# Altium PCB LSEL_PCB.PcbDoc
Units mm, origin at the board's own origin, x right, y up, seen from the top; angles counter-clockwise.
Board outline 60 x 40 mm, 4 copper layers (Top Layer, GND, VDD, Bottom Layer), stack 0.603 mm thick; 31 components, 23 nets, 143 pads, 107 vias.
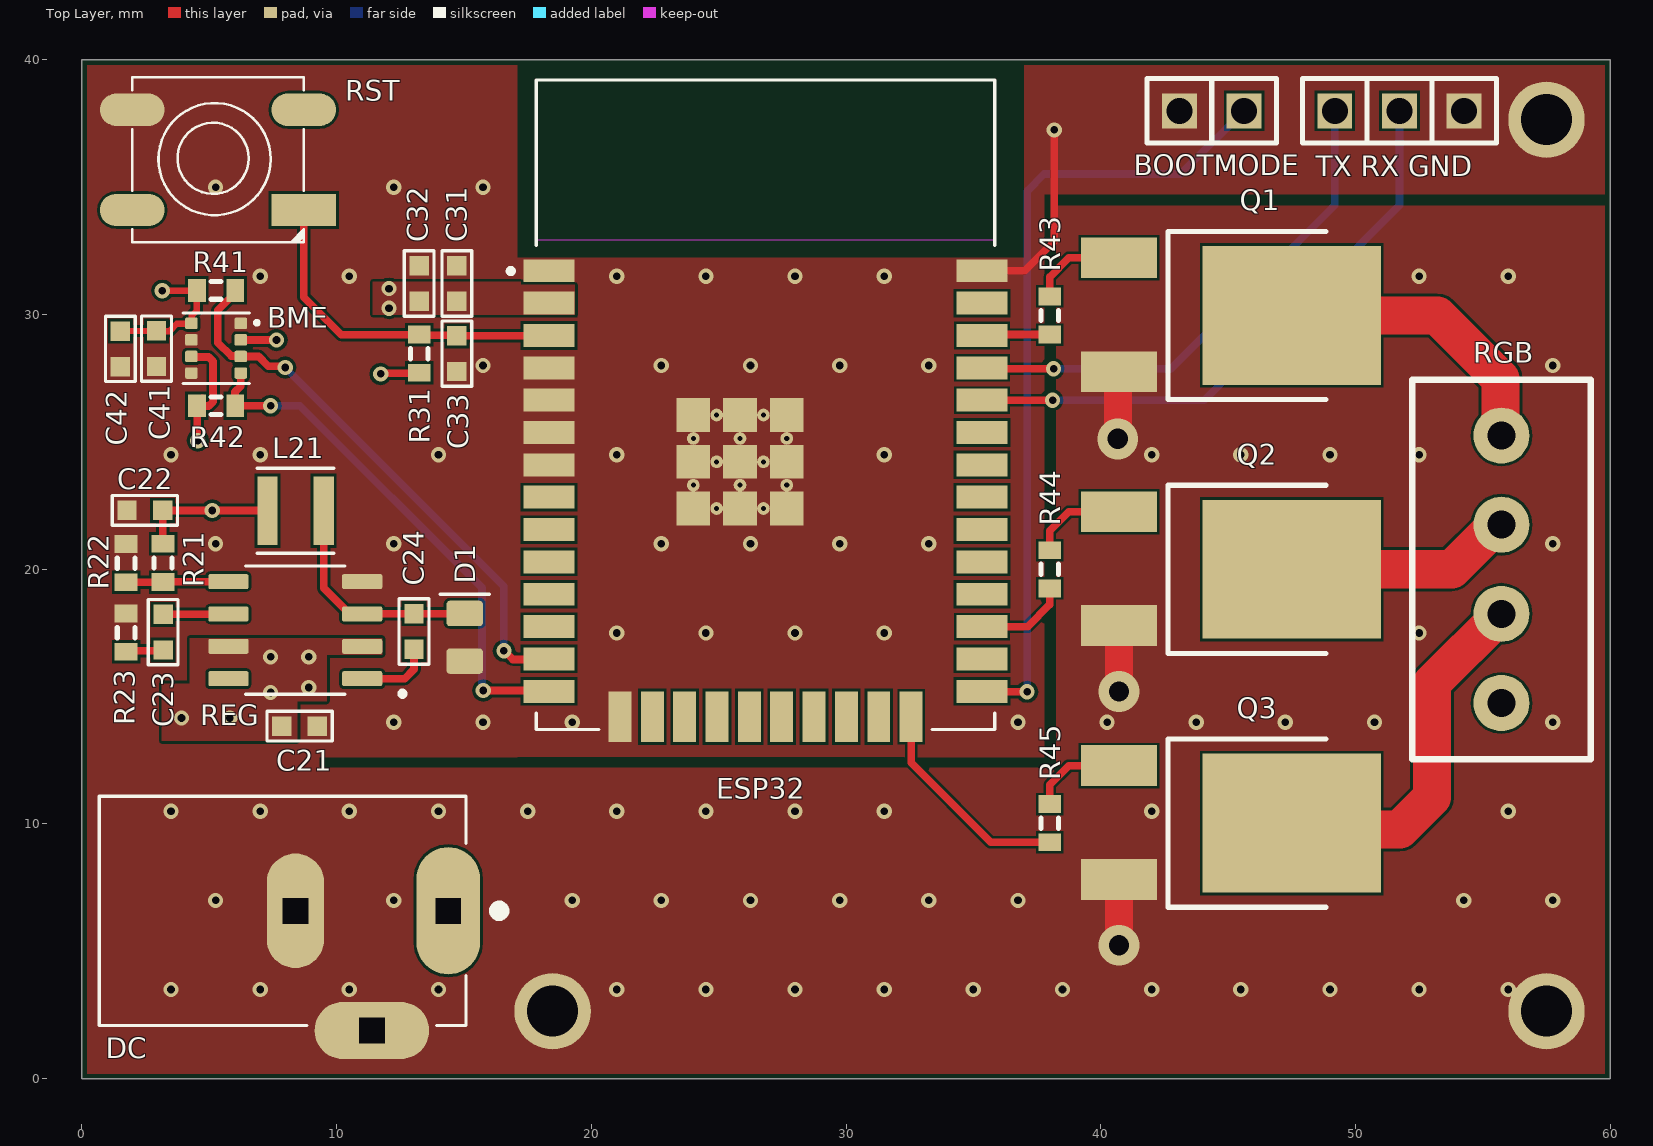
[diagram p0: Top Layer view]
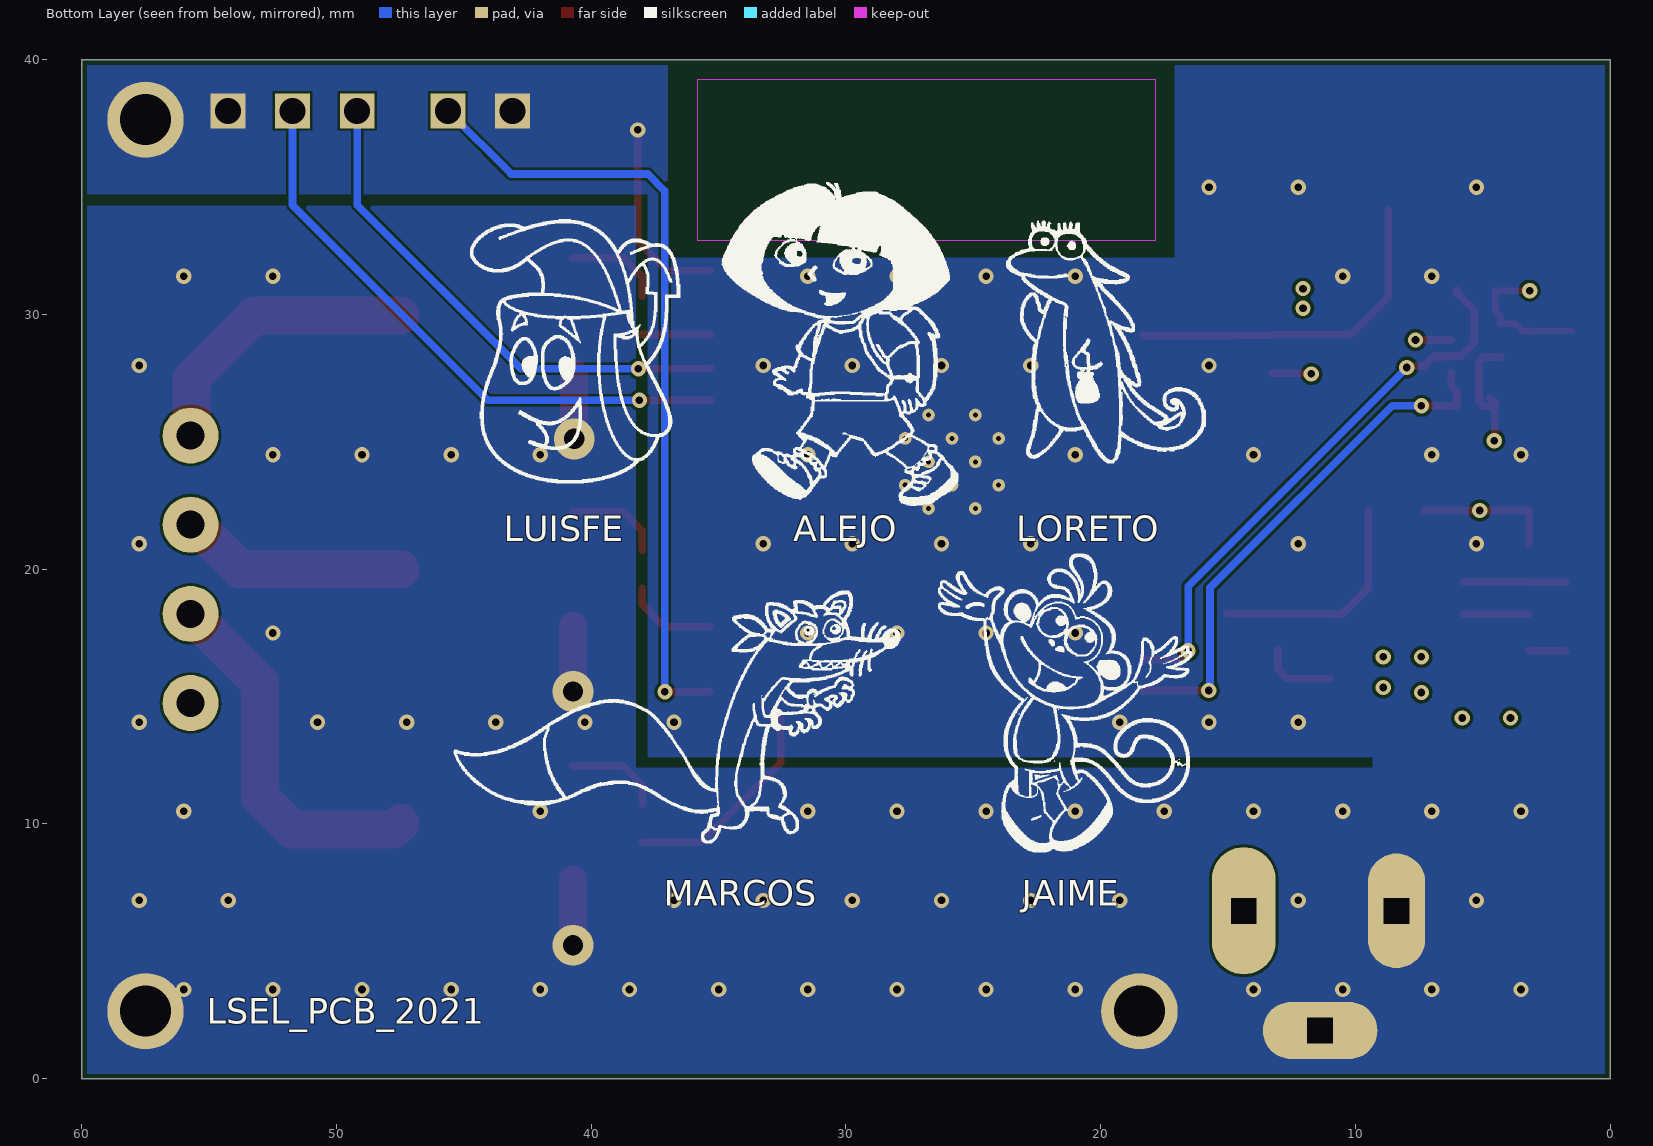
[diagram p1: Bottom Layer view, seen from below]
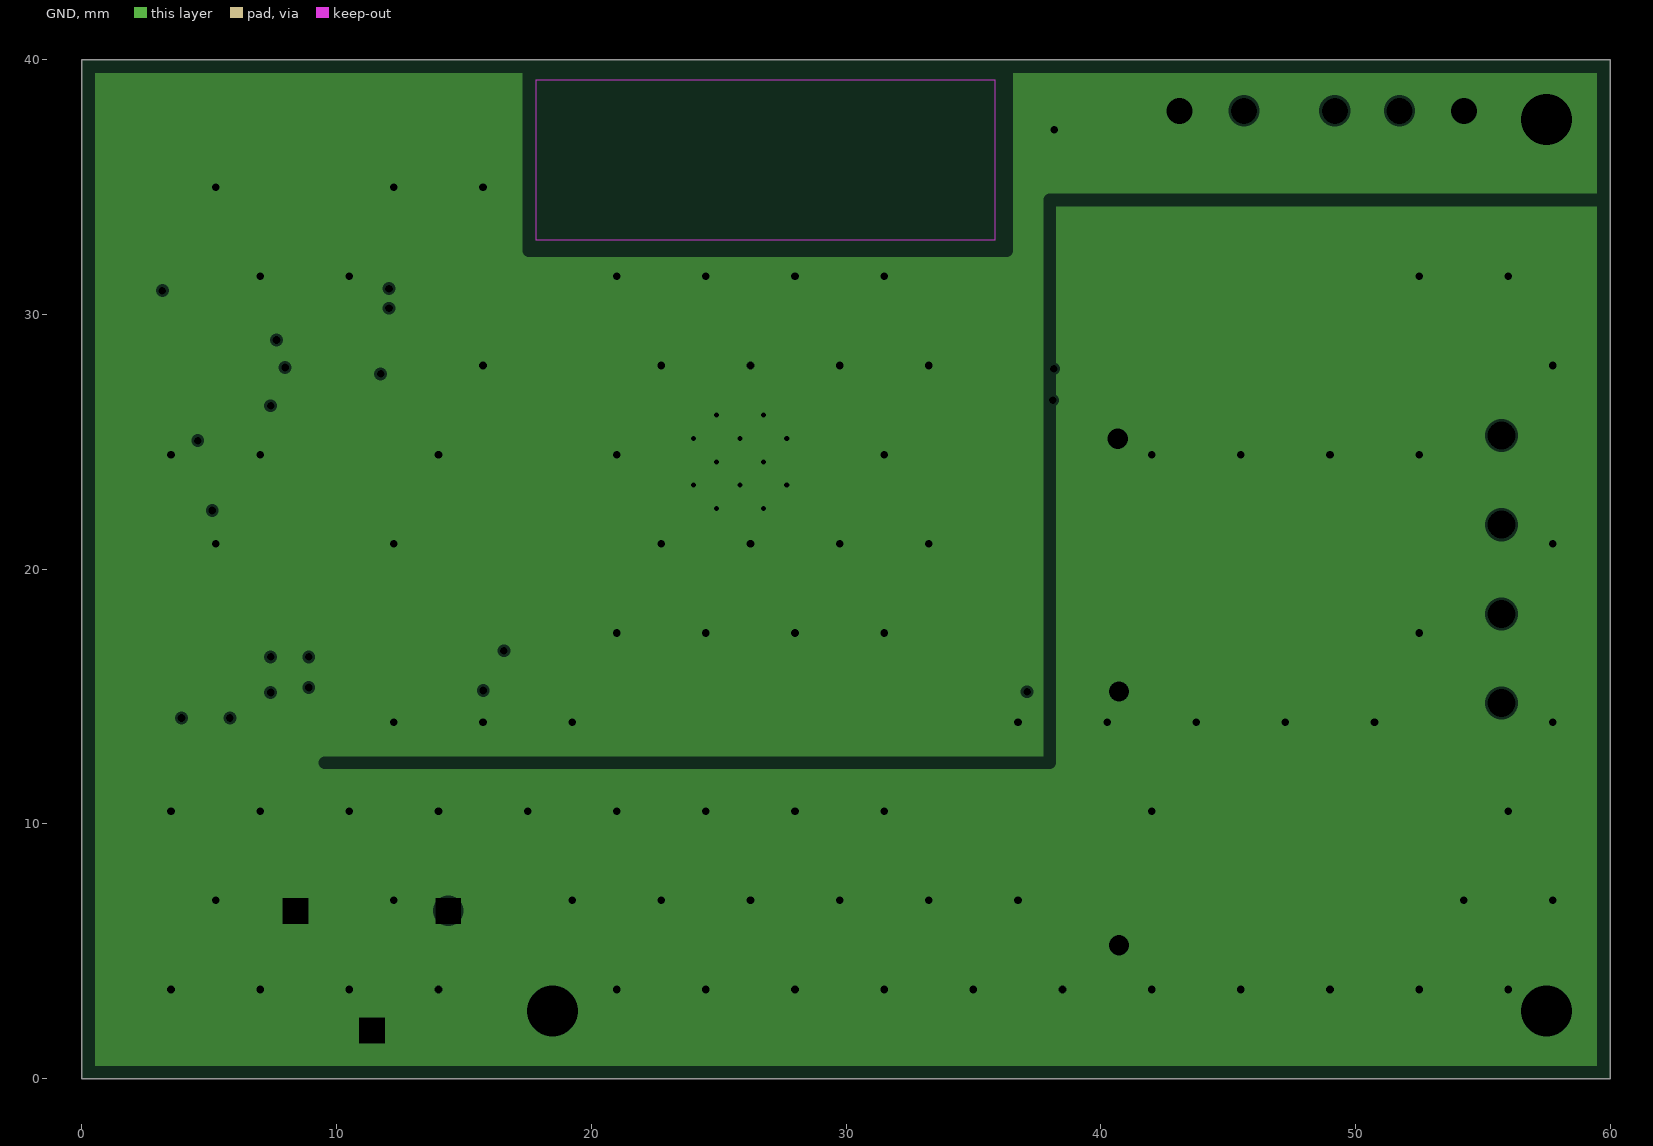
[diagram p2: GND, clearances drawn from the general rule]
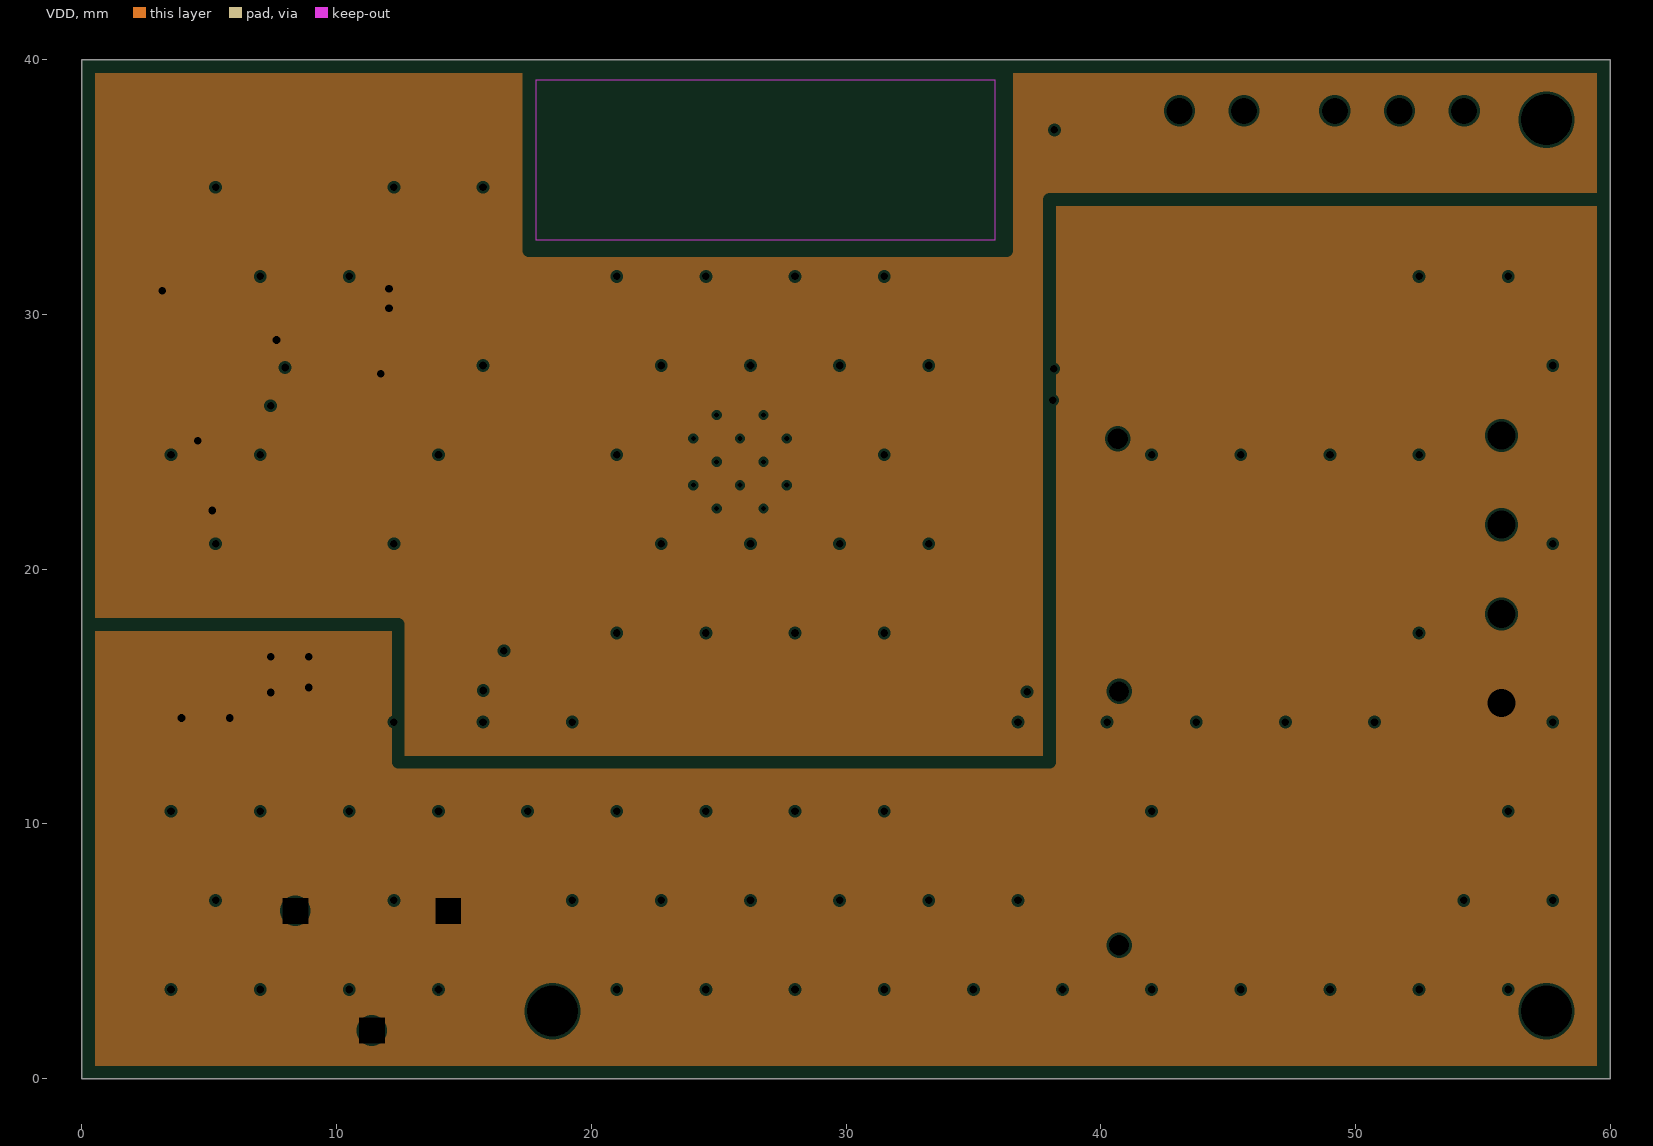
[diagram p3: VDD, clearances drawn from the general rule]

## Layer stack, top to bottom
Top Solder: solder mask 0.0102, Solder Resist, Dk 3.5
Top Layer: signal copper 0.0356
Dielectric 2: prepreg 0.0711, PP-006, Dk 4.1
GND: plane copper 0.035, net GND
Dielectric 1: dielectric 0.32, FR-4, Dk 4.8
VDD: plane copper 0.035, net (Multiple Nets)
Dielectric 3: prepreg 0.0711, PP-006, Dk 4.1
Bottom Layer: signal copper 0.0356
Bottom Solder: solder mask 0.0102, Solder Resist, Dk 3.5

## Board outline
0,0 60,0 60,40 0,40

## Design rules (kind name [scope] priority, off if disabled: settings)
BoardOutlineClearance [All] p1: gap=0.2 ignorepadtopadclearanceinfootprint=FALSE
Clearance [All] p1: gap=0.102 ignorepadtopadclearanceinfootprint=FALSE except(0.127: Arc-Via Track-Via SMDPad-Via THPad-Via Via-Via Via-Fill Via-Poly Via-Region Via-Text; 0.25: Arc-Hole Track-Hole SMDPad-Hole THPad-Hole Via-Hole Fill-Hole Poly-Hole Region-Hole Text-Hole)
ComponentClearance [All] p1: gap=0.102 collisioncheckmode=3 verticalgap=0.102 showdistances=TRUE
DiffPairsRouting [All] p1: maxlimit=0.102 minlimit=0.102 mostfreqgap=0.102 toplayer_minwidth=0.102 toplayer_maxwidth=1816.048 toplayer_prefwidth=0.102 bottomlayer_minwidth=0.102 bottomlayer_maxwidth=1816.048 bottomlayer_prefwidth=0.102 maxuncoupledlength=12.7
Height [All] p1: minheight=0 maxheight=1816.048 prefheight=12.7
HoleSize [All] p1: absolutevalues=TRUE maxlimit=6.3 minlimit=0.2 maxpercent=80.000 minpercent=20.000
HoleToHoleClearance [All] p1: gap=0.25 allowstackedmicrovias=FALSE
MinimumAnnularRing [All] p1: minimumring=0.076
MinimumSolderMaskSliver [All] p1: minsoldermaskwidth=0
PlaneClearance [All] p1: clearance=0.102
PlaneConnect PlaneConnectPowerPads [InPadClass('PowerPads')] p1: planeconnectstyle=Direct reliefexpansion=0.508 reliefentries=4 reliefconductorwidth=0.254 reliefairgap=0.254
PlaneConnect [All] p2: pad.planeconnectstyle=Relief pad.reliefexpansion=0.3 pad.reliefentries=4 pad.reliefconductorwidth=0.102 pad.reliefairgap=0.102 via.planeconnectstyle=Direct via.reliefexpansion=0.3 via.reliefentries=4 via.reliefconductorwidth=0.127 via.reliefairgap=0.127
PolygonConnect PolygonConnectPowerPads [All vs (InPadClass('PowerPads'))] p1: connectstyle=Direct reliefconductorwidth=0.254 reliefentries=4 polygonreliefangle="90 Angle" airgapwidth=0.254
PolygonConnect [All] p2: connectstyle=Direct reliefconductorwidth=0.102 reliefentries=4 polygonreliefangle="90 Angle" airgapwidth=0.102
RoutingVias [All] p1: holewidth=0.2 width=0.45 viastyle="Through Hole" minholewidth=0.2 minwidth=0.45 maxholewidth=6.3 maxwidth=6.55
SilkToSilkClearance [All] p1: silktosilkclearance=0
SilkToSolderMaskClearance [IsPad] p1: minsilkscreentomaskgap=0.102 clearancetoexposedcopper=TRUE
SolderMaskExpansion [All] p1: expansion=0.075 istentingtop=FALSE
Width [All] p1: maxlimit=1816.048 minlimit=0.102 preferedwidth=0.102
20 further rules are at their usual default settings.

## Classes and differential pairs
net class GND: GND
net class 3V: 3V3 NetC23_1 NetC23_2 NetC33_1 NetJMP1_2 NetQ1_1 NetQ2_1 NetQ3_1 NetR21_1 NetR41_1 NetR42_1 NetR43_2 NetR44_2 NetR45_2 NetU2_1 NetU2_2
net class 12V: 12V NetCON1_B NetCON1_G NetCON1_R
component class "Sensors & Actuators": BME C41 C42 Q1 Q2 Q3 R41 R42 R43 R44 R45 RGB
component class Power: C21 C22 C23 C24 D1 L21 R21 R22 R23
component class Microcontroller: BOOTMODE C31 C32 C33 ESP32 R31 RST "TX RX GND"

## Components (designator, comment, footprint, x,y, rotation, side; value= is the part's Value field where it differs from the comment)
BME "BME280" BME280 5.27,28.68 r0 top (schematic designator U4)
BOOTMODE "Jumper" jumper 43.09,38 r0 top (schematic designator JMP1)
C21 "10uF" 0603C-GENERIC 7.85,13.84 r0 top
C22 "22uF" 0603C-GENERIC 3.17,22.31 r180 top
C23 "2.2nF" 0603C-GENERIC 3.19,18.23 r270 top
C24 "10nF" 0603C-GENERIC 13.04,16.86 r90 top
C31 "10u" 0603C-GENERIC 14.72,30.523 r90 top
C32 "0.1u" 0603C-GENERIC 13.24,30.523 r90 top
C33 "0.1u" 0603C-GENERIC 14.726,29.163 r270 top
C41 "0.1u" 0603C-GENERIC 2.93,29.36 r270 top
C42 "0.1u" 0603C-GENERIC 1.51,29.35 r270 top
D1 "DIODE" RESC2012X65N 15.03,17.33 r270 top
DC "Component_1" PCBComponent_1#1 14.384,6.592 r180 top (schematic designator Connector)
ESP32 "ESP32-WROOM-32" ESP32 26.84,26.46 r0 top (schematic designator U3)
L21 "LQH3NPN150MMEL" IND_LQH3NPH3R3MMEL 8.39,22.3 r0 top
Q1 "MJD122" MJD122 45.647,29.966 r270 top
Q2 "MJD122" MJD122 45.647,20 r270 top
Q3 "MJD122" MJD122 45.647,10.033 r270 top
R21 "" J1-0603 3.19,20.25 r90 top value=17k
R22 "" J1-0603 1.74,20.24 r270 top value=10k
R23 "" J1-0603 1.74,17.51 r270 top value=10k
R31 "" J1-0603 13.246,28.463 r270 top value=10k
R41 "" J1-0603 5.27,30.95 r180 top value=4.7k
R42 "" J1-0603 5.27,26.42 r180 top value=4.7k
R43 "" J1-0603 38,29.966 r270 top value=300
R44 "" J1-0603 38,20 r270 top value=300
R45 "" J1-0603 38,10.033 r270 top value=300
REG "Component_1" AP3202 8.38,17.61 r180 top (schematic designator U1)
RGB "" PCBComponent_1#2 59.23,12.55 r90 top (schematic designator CON1)
RST "SW 6mm" SW-PB-SMD 8.71,34.103 r180 top (schematic designator SW1)
"TX RX GND" "COMPONENT_1" PCBComponent_1#3 47.92,36.73 r0 top (schematic designator U2)

## Footprints (in the part's own frame and the unit in brackets; to place one, negate y for a bottom-side part, rotate by r counter-clockwise, add the part's x,y. Pads: shape width x height; smd on the part's side, far side on the other; paste and mask are expansions set on the pad)
0603C-GENERIC [mil] "CAPACITOR 0603"
  rect 30x30 smd: 1(0,0) 2(55,0)
  silkscreen extent -23,-23 78,23, body extent -4,-15 59,15, height 19
AP3202 [mm]
  rrect25% 1.58x0.59 smd: 1(-2.625,1.905) 2(-2.625,0.635) 3(-2.625,-0.635) 4(-2.625,-1.905) 5(2.625,-1.905) 6(2.625,-0.635) 7(2.625,0.635) 8(2.625,1.905)
  silkscreen extent -4.31,-2.52 1.95,2.59, body extent -3,-2.45 3,2.45, height 1.75
BME280 [mm]
  rrect25% 0.49x0.45 smd: 1(0.97,0.975) 2(0.97,0.325) 3(0.97,-0.325) 4(0.97,-0.975) 5(-0.97,-0.975) 6(-0.97,-0.325) 7(-0.97,0.325) 8(-0.97,0.975)
  silkscreen extent -1.3,-1.38 1.65,1.39, body extent -1.52,-1.52 1.52,1.52, height 0.93
ESP32 [mm]
  rect 2x0.9 smd: 1(-8.5,5.26) 2(-8.5,3.99) 3(-8.5,2.72) 4(-8.5,1.45) 5(-8.5,0.18) 6(-8.5,-1.09) 7(-8.5,-2.36) 8(-8.5,-3.63) 9(-8.5,-4.9) 10(-8.5,-6.17) 11(-8.5,-7.44) 12(-8.5,-8.71) 13(-8.5,-9.98) 14(-8.5,-11.25) 25(8.5,-11.25) 26(8.5,-9.98) 27(8.5,-8.71) 28(8.5,-7.44) 29(8.5,-6.17) 30(8.5,-4.9) 31(8.5,-3.63) 32(8.5,-2.36) 33(8.5,-1.09) 34(8.5,0.18) 35(8.5,1.45) 36(8.5,2.72) 37(8.5,3.99) 38(8.5,5.26)
  rect 0.9x2 smd: 15(-5.715,-12.25) 16(-4.445,-12.25) 17(-3.175,-12.25) 18(-1.905,-12.25) 19(-0.635,-12.25) 20(0.635,-12.25) 21(1.905,-12.25) 22(3.175,-12.25) 23(4.445,-12.25) 24(5.715,-12.25)
  rect 1.33x1.33 smd: 39_1(-2.835,-0.405) 39_2(-1,-0.405) 39_3(0.835,-0.405) 39_4(-2.835,-2.24) 39_5(-1,-2.24) 39_6(0.835,-2.24) 39_7(-2.835,-4.075) 39_8(-1,-4.075) 39_9(0.835,-4.075)
  round 0.5 hole 0.2 mask+0.102: 39_10(-1.917,-0.405) 39_11(-0.082,-0.405) 39_12(-2.835,-1.322) 39_13(-1,-1.322) 39_14(0.835,-1.322) 39_15(-1.917,-2.24) 39_16(-0.082,-2.24) 39_17(-2.835,-3.157) 39_18(-1,-3.157) 39_19(0.835,-3.157) 39_20(-1.917,-4.075) 39_21(-0.082,-4.075)
  Keep-Out Layer region: 9,6.45 -9,6.45 -9,12.75 9,12.75
  Keep-Out Layer region: 9,6.45 -9,6.45 -9,12.75 9,12.75
  silkscreen extent -10.1,-12.75 9,12.75, body extent -9,-12.78 9,12.75, height 4.15
IND_LQH3NPH3R3MMEL [mm]
  rect 0.8x2.7 smd: 1(-1.1,0) 2(1.1,0)
  silkscreen extent -1.5,-1.67 1.5,1.67, body extent -1.5,-1.5 1.5,1.5, height 1.5
J1-0603 [mm] "Chip Resistor, Body 1.6x0.8mm, IPC High Density"
  rect 0.7x0.9 smd: 1(-0.75,0) 2(0.75,0)
  silkscreen extent -0.2,-0.35 0.2,0.35, body extent -0.85,-0.48 0.85,0.48, height 0.9
jumper [mm]
  rect 1.37x1.37 hole 1.02: 1(0,0) 2(2.54,0)
  silkscreen extent -1.27,-1.27 3.81,1.27, body extent -1.27,-1.27 3.81,1.27, height 28.45
MJD122 [mil]
  rect 63x118 smd: 1(-89,-194) 3(87,-194)
  rect 214.63x275.59 smd: 4(0,72.94)
  silkscreen extent -130,-118 130,126, body extent -128,-225 128,165, height 99
PCBComponent_1#1 [mm]
  oval 2.5x5 hole 1 square: 1(0,0)
  oval 2.25x4.5 hole 1 square: 2(6,0)
  oval 4.5x2.25 hole 1 square: 3(3,4.7)
  silkscreen extent -2.2,-4.5 13.7,4.5, body extent -1.56,-4.75 14,6.1, height 11
PCBComponent_1#2 [mm]
  round 2.2 hole 1.1 mask+0: B(12.7,3.5) G(5.7,3.5) R(9.2,3.5) Vdd(2.2,3.5)
  silkscreen extent 0,0 14.9,7, body extent 0,0 14.9,7, height 8.5
PCBComponent_1#3 [mm]
  rect 1.37x1.37 hole 1.02: 1(1.27,1.27) 2(3.81,1.27) 3(6.35,1.27)
  silkscreen extent 0,0 7.62,2.54, body extent 0,0 7.62,2.54, height 28.45
RESC2012X65N [mm]
  rrect25% 1x1.42 smd: A(0.935,0) K(-0.935,0)
  silkscreen extent -1.69,-0.96 -1.69,0.96, body extent -1.68,-0.95 1.68,0.95, height 1
SW-PB-SMD [mil]
  rect 100x50 smd: 1(0,0)
  oval 100x50 smd: 2(265,-155) 3(0,-155) 4(265,0)
  silkscreen extent 0,-205 265,50, body extent -28,-206 297,50, height 140

## Part data
BME: "Humidity Temperature Sensor 0 ~ 100% RH IÂ²C, SPI Â±3% 1s Surface Mount", Package="LGA-8 Bosch", Availability=Unavailable, MF=Bosch, MP=BME280, Price=None, SnapEDA_Link=https://www.snapeda.com/parts/BME280/Bosch%20Sensortec/view-part/49769/?ref=snap
C21 C22 C23 C24 C31 C32 C33 C41 C42: library part C0603-GENERIC, "GENERIC CAPACITOR NON POLARISED 0603"
D1: library part DIODE-GENERIC, "GENERIC DIODE"
ESP32: "Bluetooth, WiFi Transceiver Module 2.4GHz ~ 2.5GHz Surface Mount", Package="Module Espressif Systems", Digi-Key_Part_Number=1904-1010-1-ND, Digi-Key_Purchase_URL=https://www.digikey.com/product-detail/en/espressif-systems/ESP32-WROOM-32/1904-1010-1-ND/8544305?utm_source=snapeda&utm_medium=aggregator&utm_campaign=symbol, MF="Espressif Systems", MP=ESP32-WROOM-32, SnapEDA_Link=https://www.snapeda.com/parts/ESP32-WROOM-32/Espressif%20Systems/view-part/2753322/?ref=snap
L21: library part LQH3NPH3R3MMEL, "Inductor with Inductance 3.3uH Tol.+/-20% Package 1212 (3030)", Package="1212 Murata", Check_prices=https://www.snapeda.com/parts/LQH3NPH3R3MMEL/Murata/view-part/4970388/?ref=eda, Digi-Key_Part_Number=490-LQH3NPH3R3MMELCT-ND, MF=Murata, MP=LQH3NPH3R3MMEL, Purchase-URL=https://pricing.snapeda.com/search/part/LQH3NPH3R3MMEL/?ref=eda, SnapEDA_Link=https://www.snapeda.com/parts/LQH3NPH3R3MMEL/Murata/view-part/4970388/?ref=snap
Q1 Q2 Q3: "Bipolar _BJT_ Transistor NPN - Darlington 100V 8A 4MHz 1.75W Surface Mount DPAK", Package="TO-252 ON Semiconductor", Availability=Unavailable, MF="ON Semiconductor", MP=MJD122, Price=None, SnapEDA_Link=https://www.snapeda.com/parts/MJD122/ON%20Semiconductor/view-part/4705673/?ref=snap
R21 R22 R23 R31 R41 R42 R43 R44 R45: library part Res3, "Resistor", LatestRevisionDate=29-May-2009, LatestRevisionNote="IPC-7351 Footprint Added.", PackageDescription="Chip Resistor", PackageReference=J1-0603, Published=8-Jun-2000, Publisher="Altium Limited"
RGB: library part Component_1
RST: library part SW-PB6MM-SMD, "PUSHBUTTON SWITCH 6MM SMD"

## Free pads (board coordinates)
  round 3 / inner round 1.37 / far side round 3 hole 2: 2(18.48,2.65) 2(57.5,2.65) 2(57.5,37.65)

## Via types
v1: diameter 0.6, hole 0.3, Top Layer to Bottom Layer, tented both sides, 94 vias
v2: diameter 0.6, hole 0.3, Top Layer to Bottom Layer, 10 vias
v3: diameter 1.6, hole 0.8, Top Layer to Bottom Layer, tented both sides, 3 vias

## Nets (pads, with @x,y where several pads share a name; then routed paths per layer and width w, separated by ;. In a path a pad name is that pad's centre, name@x,y a point inside that pad or via, vN(x,y) a via of type N, cw(c..) or ccw(c..) an arc to the next point about the centre after c; other vN are vias at no path point)
3V3: BME.2 BME.6 BME.8 C22.1 C31.1 C32.1 C41.1 C42.1 ESP32.2 L21.1 R21.2 R31.2 R41.2 R42.2 | length 19
  Top Layer w0.25: C42.1 1.515,29.355 2.925,29.355 C41.1 2.94,29.35 3.44,29.35 3.724,29.634 4.279,29.634 BME.8 4.31,29.665 4.31,29.95 4.51,30.15 4.51,30.94 v1(3.16,30.94)
  Top Layer w0.3: R21.2 3.17,21.02 C22.1 v1(5.12,22.31) 7.28,22.31 L21.1 ; BME.6 4.321,28.334 4.974,28.334 5.15,28.158 5.15,26.586 4.974,26.41 R42.2@4.53,26.41 ; v2(4.55,25.05) 4.535,25.065 4.535,26.405 R42.2@4.53,26.41 ; R42.2@4.72,26.72 4.52,26.52 R42.2 R42.2@4.53,26.41 ; BME.2 6.243,29.003 7.637,29.003 v1(7.64,29) ; v2(11.73,27.67) 11.752,27.692 13.224,27.692 R31.2
  other v2: 12.06,30.25 12.06,31.02
12V: C21.1 DC.1 REG.2 REG.7 RGB.Vdd
  other v2: 3.91,14.16 5.81,14.16 7.41,15.16 8.91,15.36 7.41,16.56 8.91,16.56
GND: "TX RX GND.3" BME.1 BME.5 BME.7 BOOTMODE.1 C21.2 C22.2 C31.2 C32.2 C33.2 C41.2 C42.2 D1.A DC.2 DC.3 ESP32.1 ESP32.4 ESP32.5 ESP32.6 ESP32.7 ESP32.15 ESP32.38 ESP32.39_1 ESP32.39_2 ESP32.39_3 ESP32.39_4 ESP32.39_5 ESP32.39_6 ESP32.39_7 ESP32.39_8 ESP32.39_9 ESP32.39_10 ESP32.39_11 ESP32.39_12 ESP32.39_13 ESP32.39_14 ESP32.39_15 ESP32.39_16 ESP32.39_17 ESP32.39_18 ESP32.39_19 ESP32.39_20 ESP32.39_21 pad.2 Q1.3 Q2.3 Q3.3 R22.1 R23.1 REG.4 RST.2 | length 15.5
  Top Layer w0.3: ESP32.38 37.02,31.72 38.18,32.88 v1(38.18,37.25) ; Q1.3@40.67,27.707 Q1.3
  Top Layer w1.1: v3(40.67,25.12) Q1.3@40.67,27.707 ; v3(40.72,5.237) Q3.3 ; v3(40.72,15.204) Q2.3
  other v1: 3.5,3.5 7,3.5 10.5,3.5 14,3.5 21,3.5 24.5,3.5 28,3.5 31.5,3.5 35,3.5 38.5,3.5 42,3.5 45.5,3.5 49,3.5 52.5,3.5 56,3.5 5.25,7 12.25,7 19.25,7 22.75,7 26.25,7 29.75,7 33.25,7 36.75,7 54.25,7 57.75,7 3.5,10.5 7,10.5 10.5,10.5 14,10.5 17.5,10.5 21,10.5 24.5,10.5 28,10.5 31.5,10.5 42,10.5 56,10.5 12.25,14 15.75,14 19.25,14 36.75,14 40.25,14 43.75,14 47.25,14 50.75,14 57.75,14 21,17.5 24.5,17.5 28,17.5 31.5,17.5 52.5,17.5 5.25,21 12.25,21 22.75,21 26.25,21 29.75,21 33.25,21 57.75,21 3.5,24.5 7,24.5 14,24.5 21,24.5 31.5,24.5 42,24.5 45.5,24.5 49,24.5 52.5,24.5 15.75,28 22.75,28 26.25,28 29.75,28 33.25,28 57.75,28 7,31.5 10.5,31.5 21,31.5 24.5,31.5 28,31.5 31.5,31.5 52.5,31.5 56,31.5 5.25,35 12.25,35 15.75,35
NetC23_1: C23.1 REG.6 | length 2.6
  Top Layer w0.3: C23.1 3.197,18.237 5.747,18.237 REG.6
NetC23_2: C23.2 R23.2 | length 1.5
  Top Layer w0.3: R23.2 1.777,16.796 3.153,16.796 C23.2
NetC24_1: C24.1 REG.1 | length 3
  Top Layer w0.3: REG.1 12.675,15.705 13.04,16.07 C24.1
NetC24_2: C24.2 D1.K L21.2 REG.3 | length 9
  Top Layer w0.3: L21.2 9.49,19.265 10.51,18.245 REG.3 11.011,18.251 13.034,18.251 C24.2 13.044,18.261 15.026,18.261 D1.K
NetC33_1: C33.1 ESP32.3 R31.1 RST.1 | length 13.7
  Top Layer w0.3: RST.1 8.71,30.687 10.183,29.213 R31.1 13.271,29.188 14.701,29.188 C33.1 18.323,29.163 ESP32.3
NetCON1_B: Q1.4 RGB.B | length 11.5
  Top Layer w1.5: Q1.4 53.214,29.966 55.7,27.48 55.7,25.28 RGB.B
NetCON1_G: Q3.4 RGB.G | length 14.5
  Top Layer w1.5: Q3.4 47.753,9.78 51.74,9.78 53.01,11.05 53.01,15.53 RGB.G
NetCON1_R: Q2.4 RGB.R | length 9
  Top Layer w1.5: Q2.4 53.791,20 55.541,21.75 RGB.R
NetJMP1_2: BOOTMODE.2 ESP32.25 | length 31.3
  Top Layer w0.3: ESP32.25 35.36,15.19 v1(37.11,15.19)
  Bottom Layer w0.3: v1(37.11,15.19) 37.11,34.85 37.78,35.52 43.15,35.52 BOOTMODE.2
NetQ1_1: Q1.1 R43.1 | length 3.8
  Top Layer w0.3: R43.1 38,31.473 38.754,32.227 Q1.1
NetQ2_1: Q2.1 R44.1 | length 3.8
  Top Layer w0.3: R44.1 38,21.507 38.754,22.261 Q2.1
NetQ3_1: Q3.1 R45.1 | length 3.8
  Top Layer w0.3: R45.1 38,11.54 38.754,12.294 Q3.1
NetR21_1: R21.1 R22.2 REG.5 | length 4
  Top Layer w0.3: R22.2 1.745,19.495 3.185,19.495 R21.1 3.197,19.507 5.747,19.507 REG.5
NetR41_1: BME.3 ESP32.13 R41.1 | length 22
  Top Layer w0.3: R41.1 6.02,30.85 5.34,30.17 5.34,28.897 5.861,28.376 6.219,28.376 BME.3 6.935,28.355 7.313,27.977 7.923,27.977 v1(7.98,27.92) ; v1(16.57,16.8) 16.91,16.46 18.32,16.46 ESP32.13
  Bottom Layer w0.3: v1(7.98,27.92) 16.57,19.33 v1(16.57,16.8)
NetR42_1: BME.4 ESP32.14 R42.1 | length 20.7
  Top Layer w0.3: BME.4 6.24,27.19 6.01,26.96 6.01,26.43 R42.1 v1(7.41,26.42) ; v1(15.76,15.24) 18.31,15.24 ESP32.14
  Bottom Layer w0.3: v1(7.41,26.42) 8.56,26.42 15.71,19.27 15.71,15.29 v1(15.76,15.24)
NetR43_2: ESP32.36 R43.2 | length 2.7
  Top Layer w0.3: ESP32.36 35.376,29.216 R43.2
NetR44_2: ESP32.27 R44.2 | length 3.7
  Top Layer w0.3: ESP32.27 37.13,17.75 38,18.62 R44.2
NetR45_2: ESP32.24 R45.2 | length 8.5
  Top Layer w0.3: ESP32.24 32.555,12.405 35.677,9.283 R45.2
NetU2_1: "TX RX GND.1" ESP32.35 | length 20.2
  Top Layer w0.3: ESP32.35 35.38,27.87 v1(38.15,27.87)
  Bottom Layer w0.3: v1(38.15,27.87) 42.76,27.87 49.19,34.3 49.19,38
NetU2_2: "TX RX GND.2" ESP32.34 | length 23.3
  Top Layer w0.3: ESP32.34 v1(38.11,26.64)
  Bottom Layer w0.3: v1(38.11,26.64) 44.07,26.64 51.73,34.3 51.73,38
pads on no net: ESP32.8 ESP32.9 ESP32.10 ESP32.11 ESP32.12 ESP32.16 ESP32.17 ESP32.18 ESP32.19 ESP32.20 ESP32.21 ESP32.22 ESP32.23 ESP32.26 ESP32.28 ESP32.29 ESP32.30 ESP32.31 ESP32.32 ESP32.33 ESP32.37 REG.8 RST.3 RST.4

## Polygon pours and split planes (outlines as drawn)
GND on Bottom Layer "Bottom Layer-GND" (solid, pour order 39): 0,0 60,0 60,12.2 60,34.27 38.26,34.27 38.26,12.2 9.31,12.2 9.31,12.62 17.086,12.62 37.78,12.62 37.78,32.03 37.78,34.73 60,34.73 60,40 37,40 37,32.24 17.086,32.24 17.086,40 0,40
GND on Top Layer "Top Layer-GND" (solid, pour order 40): 0,0 60,0 60,12.2 60,34.27 38.26,34.27 38.26,12.2 9.31,12.2 9.31,12.62 17.086,12.62 37.78,12.62 37.78,32.03 37.78,34.73 60,34.73 60,40 37,40 37,32.24 17.086,32.24 17.086,40 0,40
3V3 on Top Layer "3V3_L01_P001" (solid, pour order 1): 19.36,31.28 11.43,31.28 11.43,30 19.36,30
12V on Top Layer "12V_L01_P026" (solid, remove dead copper, pour order 26): 11.8,17.3 11.8,16.64 9.62,16.64 9.62,14.82 8.46,14.82 8.46,13.26 3.14,13.26 3.14,15.51 4.24,15.51 4.24,17.3
12V on VDD (split plane): 59.49,0.51 0.51,0.51 0.51,17.578 12.168,17.578 12.168,12.42 12.176,12.355 12.202,12.294 12.242,12.242 12.294,12.202 12.355,12.176 12.42,12.168 37.99,12.168 38.055,12.176 38.116,12.202 38.168,12.242 38.208,12.294 38.234,12.355 38.242,12.42 38.242,34.268 59.49,34.268
3V3 on VDD (split plane): 59.49,34.772 37.99,34.772 37.925,34.764 37.864,34.738 37.812,34.698 37.772,34.646 37.746,34.585 37.738,34.52 37.738,12.672 12.672,12.672 12.672,17.83 12.664,17.895 12.638,17.956 12.598,18.008 12.546,18.048 12.485,18.074 12.42,18.082 0.51,18.082 0.51,39.49 17.288,39.49 17.288,32.51 17.296,32.445 17.322,32.384 17.362,32.332 17.414,32.292 17.475,32.266 17.54,32.258 36.3,32.258 36.365,32.266 36.426,32.292 36.478,32.332 36.518,32.384 36.544,32.445 36.552,32.51 36.552,39.49 59.49,39.49
GND on GND (split plane): 59.49,34.752 38,34.752 37.935,34.744 37.874,34.718 37.822,34.678 37.782,34.626 37.756,34.565 37.748,34.5 37.748,12.652 9.532,12.652 9.467,12.644 9.406,12.618 9.354,12.578 9.314,12.526 9.289,12.465 9.28,12.4 9.289,12.335 9.314,12.274 9.354,12.222 9.406,12.182 9.467,12.156 9.532,12.148 38,12.148 38.065,12.156 38.126,12.182 38.178,12.222 38.218,12.274 38.244,12.335 38.252,12.4 38.252,34.248 59.49,34.248 59.49,0.51 0.51,0.51 0.51,39.49 17.288,39.49 17.288,32.51 17.296,32.445 17.322,32.384 17.362,32.332 17.414,32.292 17.475,32.266 17.54,32.258 36.3,32.258 36.365,32.266 36.426,32.292 36.478,32.332 36.518,32.384 36.544,32.445 36.552,32.51 36.552,39.49 59.49,39.49

## Other copper
GND (plane layer: these items are gaps in the copper):
  rectangle: 17.54,32.51 36.3,40
  lines w0.3: 17.54,40 36.3,40
  lines w0.5: 9.532,12.4 38,12.4 38,34.5 60,34.5 ; 17.54,40 17.54,32.51 36.3,32.51 36.3,40
VDD (plane layer: these items are gaps in the copper):
  rectangle: 17.54,32.51 36.3,40
  lines w0.5: 0,17.83 12.42,17.83 12.42,12.42 37.99,12.42 37.99,34.52 59.99,34.52 ; 17.54,40 17.54,32.51 36.3,32.51 36.3,40

## Silkscreen, mask and mechanical layers (free items; w line width, h text height)
Bottom Overlay:
  drawing of 28 lines, arcs and shapes, not listed
  text "LORETO" at 23.31,21.1 h1
  text "ALEJO" at 32.08,21.1 h1
  text "LUISFE" at 43.44,21.1 h1
  text "JAIME" at 23.1,6.8 h1
  text "MARCOS" at 37.15,6.8 h1
  text "LSEL_PCB_2021" at 55.1,2.157 h1
Mechanical 1:
  the board outline again, w0.3

## Text inside footprints (layer, text, board x,y; h text height)
ESP32: Mechanical 13 "ANTENNA" at 20.84,35.46 h1.78
Q1: Mechanical 13 "1" at 43.116,32.383 h0.61 r270; Mechanical 13 "2" at 43.12,30.169 h0.61 r270; Mechanical 13 "3" at 43.119,27.984 h0.61 r270; Mechanical 13 "4" at 47.492,30.297 h0.61 r270
Q2: Mechanical 13 "1" at 43.116,22.417 h0.61 r270; Mechanical 13 "2" at 43.12,20.203 h0.61 r270; Mechanical 13 "3" at 43.119,18.018 h0.61 r270; Mechanical 13 "4" at 47.492,20.331 h0.61 r270
Q3: Mechanical 13 "1" at 43.116,12.45 h0.61 r270; Mechanical 13 "2" at 43.12,10.236 h0.61 r270; Mechanical 13 "3" at 43.119,8.051 h0.61 r270; Mechanical 13 "4" at 47.492,10.364 h0.61 r270